# Altium PCB Light Sensor Breakout.PcbDoc
Units mil, origin at the board's own origin, x right, y up, seen from the top; angles counter-clockwise.
Board outline 905.51 x 767.72 mil, 2 copper layers (Top Layer, Bottom Layer); 10 components, 9 nets, 30 pads, 3 vias.
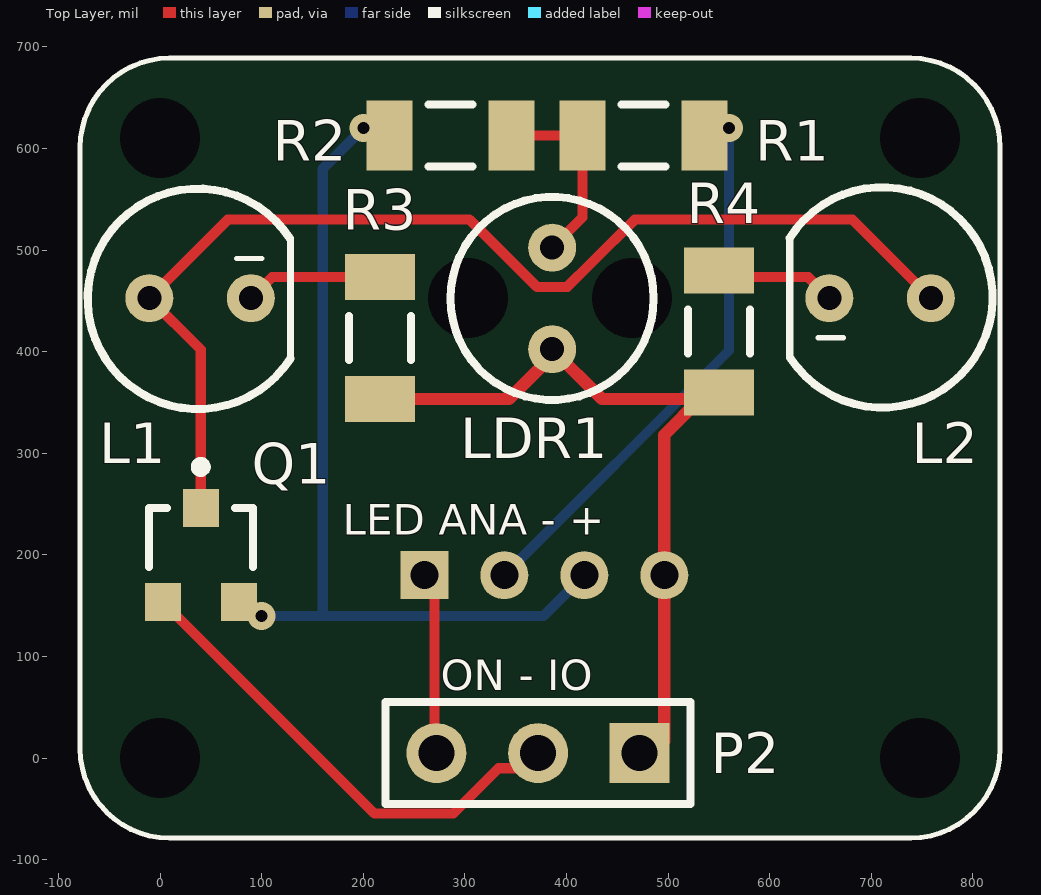
[diagram p0: Top Layer view]
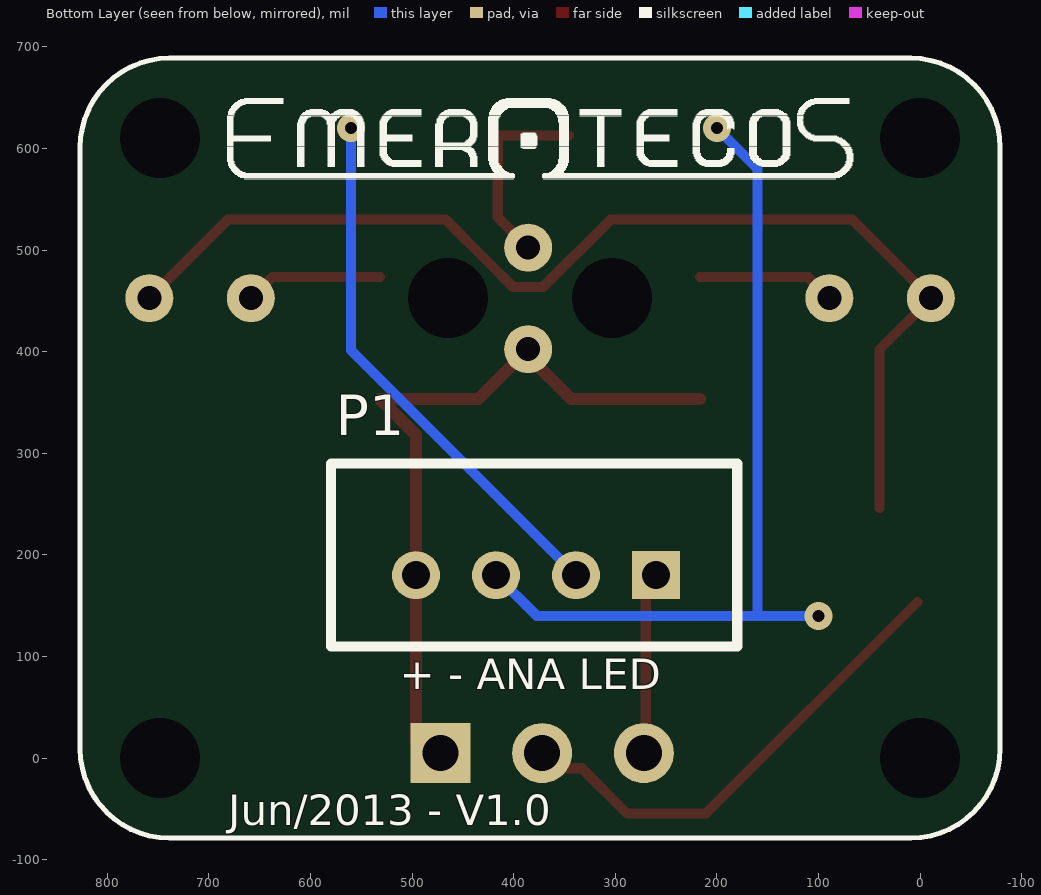
[diagram p1: Bottom Layer view, seen from below]

## Layer stack, top to bottom
Top Layer: signal copper 1.4
Dielectric: dielectric 12.6, FR-4, Dk 4.8
Bottom Layer: signal copper 1.4

## Board outline
-78.74,9.26 -78.74,600.98 cw(c9.26,600.98) 9.26,688.98 738.77,688.98 cw(c738.77,600.98) 826.77,600.98 826.77,9.26 cw(c738.77,9.26) 738.77,-78.74 9.26,-78.74 cw(c9.26,9.26)

## Design rules (kind name [scope] priority, off if disabled: settings)
Clearance [All] p1: gap=8
HoleSize [All] p1: absolutevalues=TRUE maxlimit=250 minlimit=12 maxpercent=80.000 minpercent=20.000
MinimumAnnularRing [All] p1: minimumring=6
MinimumSolderMaskSliver [All] p1 off: minsoldermaskwidth=0
PolygonConnect [All] p1: connectstyle=Relief reliefconductorwidth=10 reliefentries=4 polygonreliefangle="90 Angle"
RoutingVias [All] p1: holewidth=12 width=24 viastyle="Through Hole" minholewidth=12 minwidth=24 maxholewidth=12 maxwidth=34
SilkToSilkClearance [All] p1 off: silktosilkclearance=0
SilkscreenOverComponentPads [All] p1: minsilkscreentomaskgap=1
SolderMaskExpansion [All] p1: expansion=4
Width VCC's [(InNet('+3V3') OR InNet('+5V') OR InNet('USBVCC') OR InNet('USBVCCU2'))] p1: maxlimit=30 minlimit=12 preferedwidth=30
Width [All] p2: maxlimit=20 minlimit=8 preferedwidth=8
24 further rules are at their usual default settings.

## Components (designator, comment, footprint, x,y, rotation, side; value= is the part's Value field where it differs from the comment)
L1 "LED" LED-5mm 39.37,452.76 r0 top
L2 "LED" LED-5mm 708.66,452.76 r180 top
LDR1 "LDR" LDR-5mm 385.83,452.44 r90 top
P1 "JST PH 4" B4B-PH-K 260,180 r0 bottom
P2 "Header 3" HDR1X3 472,5 r180 top
Q1 "BSS138" SOT23 40,200 r0 top
R1 "1K" RES1206 475.83,612.76 r180 top
R2 "1K" RES1206 285.83,612.76 r0 top
R3 "1K" RES1206 216.54,413.39 r270 top
R4 "1K" RES1206 550,420 r270 top

## Footprints (in the part's own frame and the unit in brackets; to place one, negate y for a bottom-side part, rotate by r counter-clockwise, add the part's x,y. Pads: shape width x height; smd on the part's side, far side on the other; paste and mask are expansions set on the pad)
B4B-PH-K [mm] "JST PH 4 Pin"
  rect 1.2x1.2 hole 0.7: 1(0,0)
  round 1.2 hole 0.7: 2(2,0) 3(4,0) 4(6,0)
  silkscreen extent -2.03,-2.79 8.13,1.78, body extent -1.9,-2.72 8,1.78, height 6
HDR1X3 [mm] "Connector; Header; 3 Position"
  rect 1.5x1.5 hole 0.9: 1(0,0)
  round 1.5 hole 0.9: 2(2.54,0) 3(5.08,0)
  silkscreen extent -1.27,-1.27 6.35,1.27
LDR-5mm [mm]
  round 1.2 hole 0.6: 1(-1.27,0) 2(1.27,0)
  silkscreen extent -2.54,-2.54 2.54,2.54, body extent -2.48,-2.49 2.5,2.5, height 2
LED-5mm [mm]
  round 1.2 hole 0.6: 1(1.27,0) 2(-1.27,0)
  silkscreen extent -2.81,-2.77 2.26,2.73, body extent -2.8,-2.8 2.8,2.8, height 8
RES1206 [mm] "Chip Resistor, 2-Leads, Body 3,1x1,6mm, IPC Medium Density"
  rect 1.15x1.75 smd: 1(-1.525,0) 2(1.525,0)
  silkscreen extent -0.55,-0.77 0.55,0.77, body extent -1.6,-0.8 1.6,0.8, height 0.55
SOT23 [mm] "SOT-23; 3 Leads; Body 3.1 x 2.5 mm, inc. leads (LxW max), Alternate Lead Configuration"
  rect 0.9x0.95 smd: 1(0,1.175) 2(0.95,-1.175) 3(-0.95,-1.175)
  silkscreen extent -1.3,-0.3 1.3,2.32

## Part data
P2: "Header, 3-Pin"
Q1: "N-Channel Enhancement Mode Vertical DMOS FET"
R1 R2 R3 R4: library part RES

## Free pads (board coordinates)
  round 51.18 hole 78.74: H(0,0) H(0,610.24) H(303.15,452.76) H(464.57,452.76) H(748.03,0) H(748.03,610.24)

## Via types
v1: diameter 27.56, hole 11.81, Top Layer to Bottom Layer, tented both sides, 3 vias

## Nets (pads, with @x,y where several pads share a name; then routed paths per layer and width w, separated by ;. In a path a pad name is that pad's centre, name@x,y a point inside that pad or via, vN(x,y) a via of type N, cw(c..) or ccw(c..) an arc to the next point about the centre after c; other vN are vias at no path point)
+3V3: LDR1.1 P1.4 P2.1 R3.2 R4.2 | length 748.3
  Top Layer w12: R3.2 343.35,353.35 385.83,395.83 LDR1.1 434.92,353.35 531.5,353.35 496.22,318.07 P1.4 496.22,16.22 P2.1@470,-10
ANA: P1.2 R1.1 | length 531.6
  Bottom Layer w10: P1.2 560,401.26 v1(560,620)
GND: P1.3 Q1.2 R2.1 | length 830.6
  Bottom Layer w10: v1(100,140) 160,140 ; v1(200,620) 160,580 160,140 ; P1.3 377.48,140 160,140
IO: P2.2 Q1.3 | length 472.1
  Top Layer w10: Q1.3 210.87,-54.53 288.44,-54.53 332.97,-10 P2.2@370,-10
LED: P1.1 P2.3 | length 194.1
  Top Layer w10: P1.1 270,170 P2.3@270,-10
NetL1_1: L1.1 R3.1 | length 135.7
  Top Layer w10: L1.1 110.04,473.43 R3.1
NetL1_2: L1.2 L2.2 Q1.1 | length 1115.6
  Top Layer w10: Q1.1 40,402.13 L1.2 66.61,530 304.65,530 370.83,463.82 400.83,463.82 424.28,487.27 467.01,530 681.42,530 L2.2
NetL2_1: L2.1 R4.1 | length 135.7
  Top Layer w10: R4.1@531.5,473.43 637.99,473.43 L2.1
NetLDR1_2: LDR1.2 R1.2 R2.2 | length 192.6
  Top Layer w10: R2.2 R1.2 415.79,532.4 LDR1.2

## Silkscreen, mask and mechanical layers (free items; w line width, h text height)
Top Overlay:
  lines w5: -78.74,9.26 ccw(c9.26,9.26) 9.26,-78.74 738.77,-78.74 ccw(c738.77,9.26) 826.77,9.26 826.77,600.98 ccw(c738.77,600.98) 738.77,688.98 393.7,688.98 9.26,688.98 ccw(c9.26,600.98) -78.74,600.98 -78.74,9.26
  text "LED ANA - +" at 180,220 h30
  text "ON - IO" at 276,67 h30
Bottom Overlay:
  drawing of 939 lines, arcs and shapes, not listed
  text "+ - ANA LED" at 512,68 h30
  text "Jun/2013 - V1.0" at 681,-66 h30
Bottom Solder:
  drawing of 1111 lines, arcs and shapes, not listed